# EAGLE board ProjectSchematic_v40 (EAGLE 9.7.0)
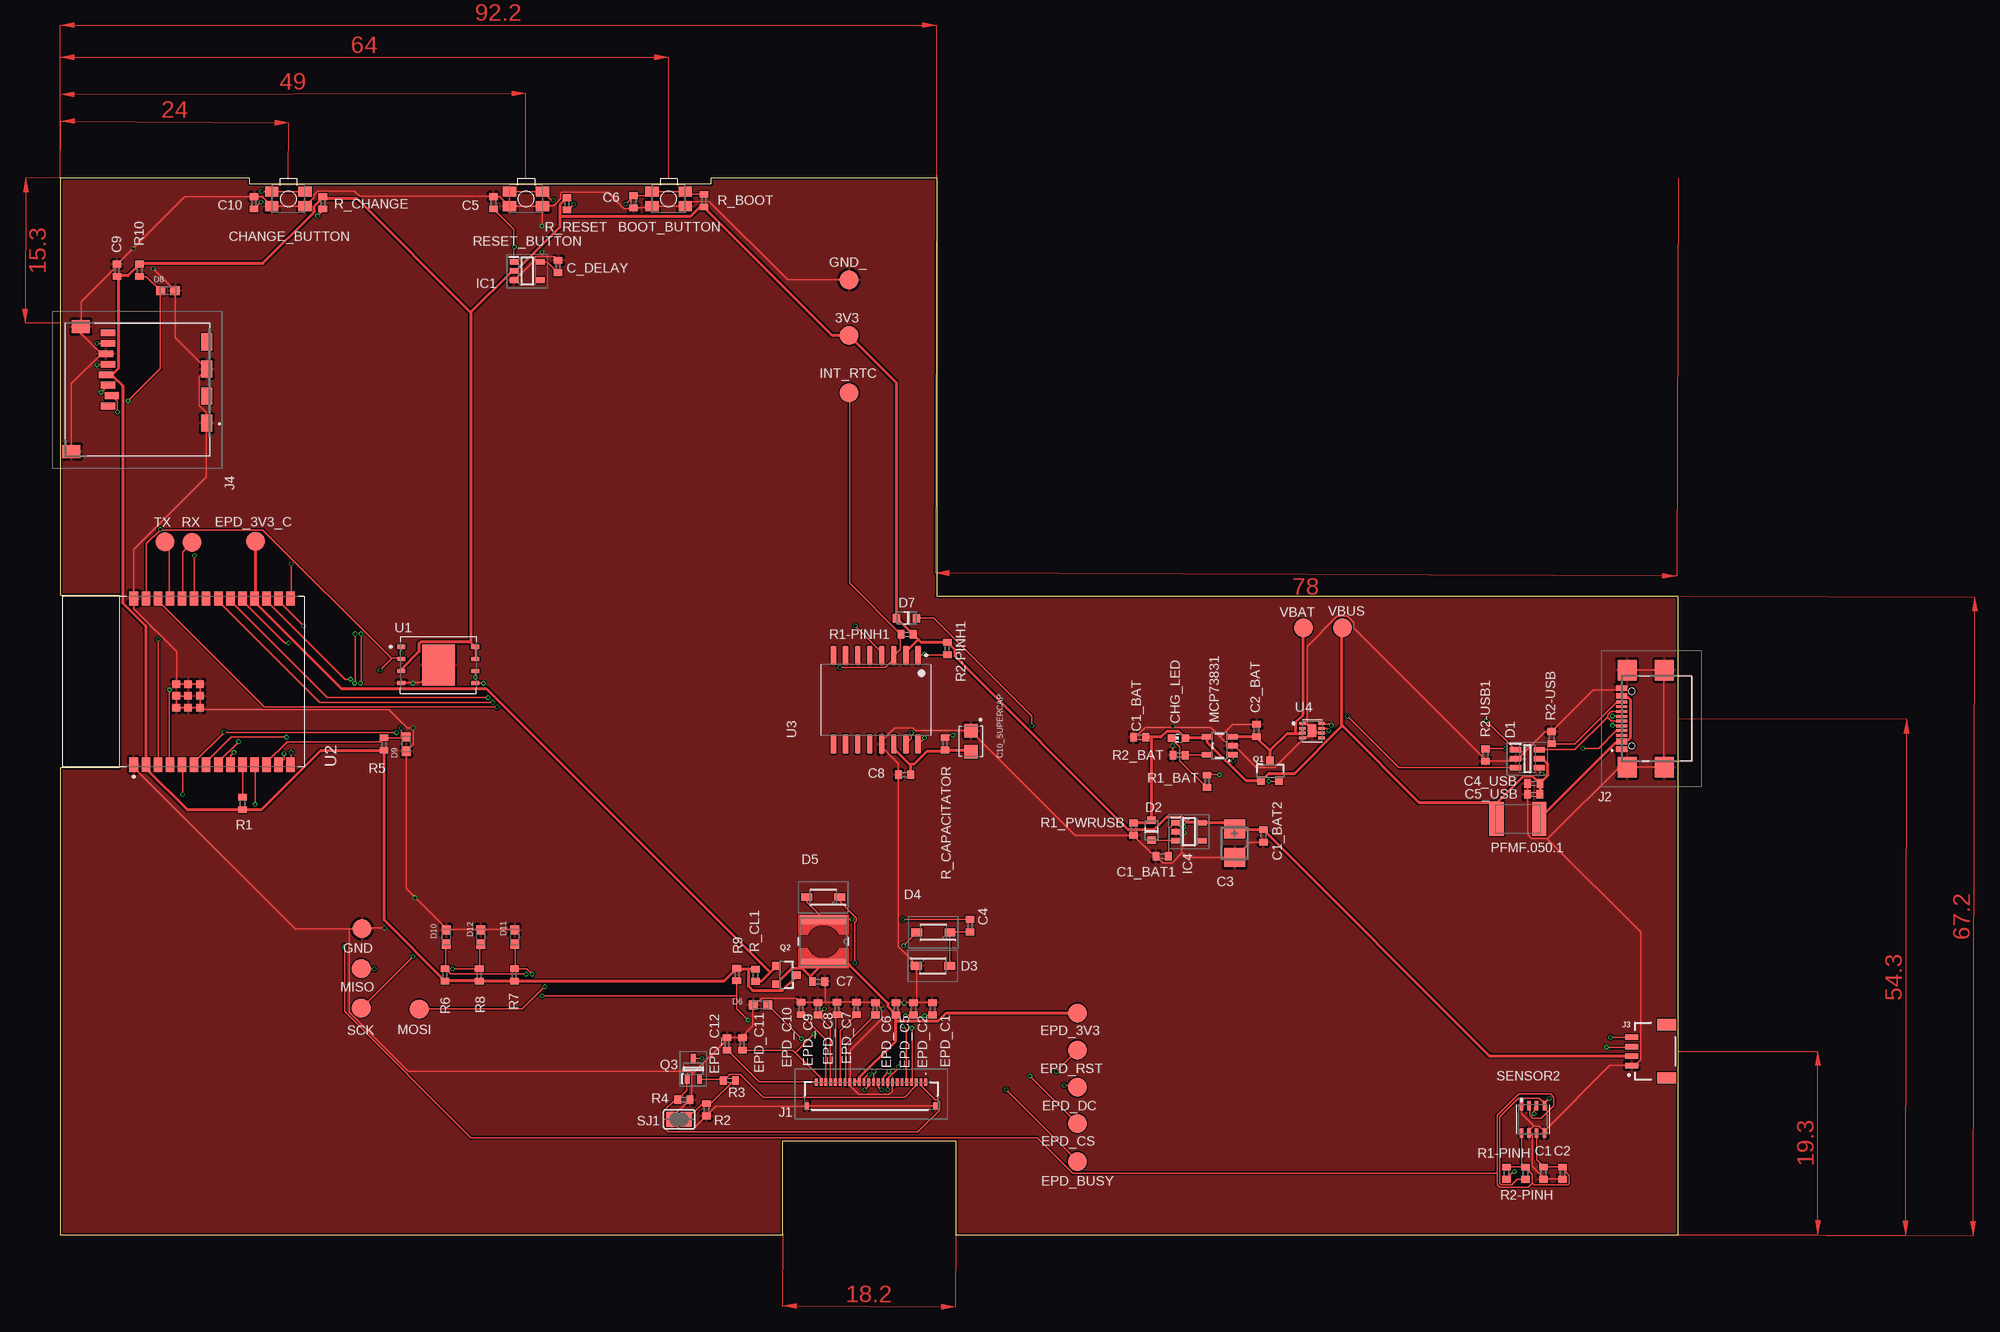
[diagram p0: board, top side]
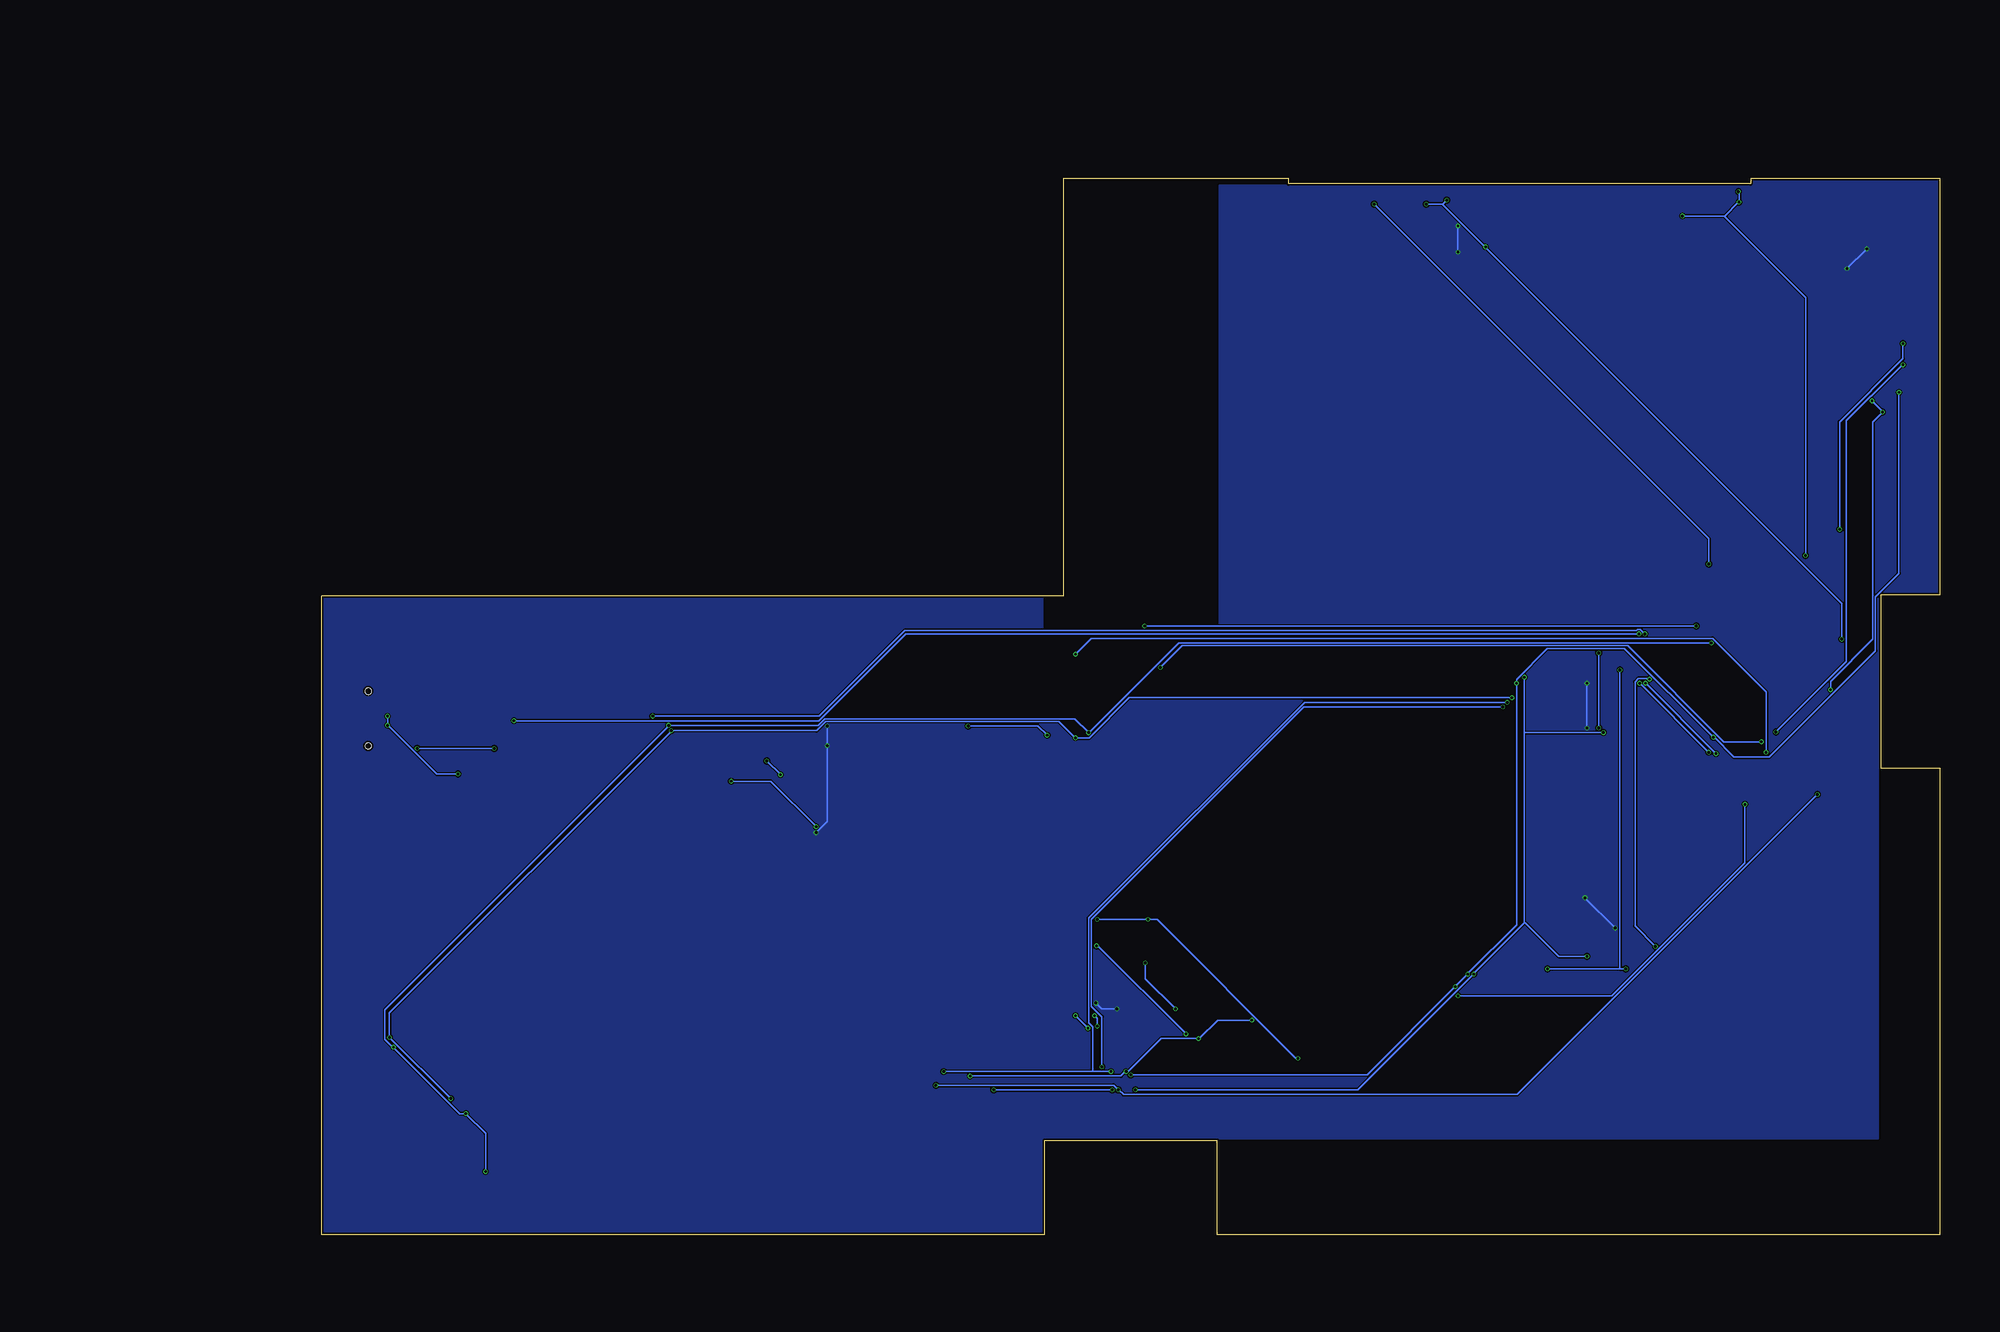
[diagram p1: board, bottom side, seen from below]

Size 170.2 x 111.2 mm. Coordinates in mm from the lower left corner, seen from the top.
Outline: 0,0 76,0 76,9.9 94.2,9.9 94.2,0 170.2,0 170.2,67.2 92.2,67.2 92.2,111.2 68.5,111.2 68.5,110.6 19.9,110.6 19.9,111.2 0,111.2 0,67.3 6.2,67.3 6.2,49.1 0,49.1 0,0
Copper layers (1*16): Top 0.035mm / dielectric 1.6mm / Bottom 0.035mm
Design rules "jlcpcb-2layers.dru": minimum track width 0.15mm, minimum drill 0.3mm, track to track 5mil, track to pad 5mil, pad to pad 5mil, via to via 5mil, smd to smd 5mil, copper to edge 0.2mm, drill to drill 6mil, minimum pad ring 10mil, minimum via ring 3mil, stop-mask expansion 4mil, vias tented up to drill 0mil, thermal gap 10mil
Net classes: 1 Alimentare: width 0.3 mm

## Footprints (pad centres in the part's own frame; a part is rotated, then mirrored left to right if it is on the bottom)
TP20R = smd 2 x 2: TP 0,0
MYBUTTON = smd 1.4 x 1.05: 1 1.75,0.75; 2 -1.75,0.75; 3 -1.75,-0.75; 4 1.75,-0.75
ESP32_WROVER_EAGLE-LTSPICE_C0402 = smd 0.7 x 0.9: 1 -0.65,0; 2 0.65,0
RCL_CT3528 = smd 2 x 2.2: + -1.5,0; - 1.5,0
CAPCP3225X100N = smd 1.4 x 1.4: 1 -1.1,0; 2 1.1,0
ADAFRUIT_CHIP-LED0603 = smd 0.8 x 0.8: A 0,-0.75; C 0,0.75
SOT95P280X145-6N = smd 1.2 x 0.6: 1 -1.25,0.95; 2 -1.25,0; 3 -1.25,-0.95; 4 1.25,-0.95; 5 1.25,0; 6 1.25,0.95
ESP32_WROVER_AVX---SD0805S020S1R0_AVX_SD0805S020S1R0_0 = smd 0.8 x 0.9: 1 -1.05,0; 2 1.05,0
SOD3716X135N = smd 1.15 x 0.8: 1 -1.75,0; 2 1.75,0
DIOC1608X36N = smd 0.97 x 0.94: 1 -0.75,0; 2 0.75,0
SOT95P280X125-5N = smd 0.9 x 0.6: 1 -1.4,0.95; 2 -1.4,0; 3 -1.4,-0.95; 4 1.4,-0.95; 5 1.4,0.95
SOT95P280X120-5N = smd 0.9 x 0.6: 1 -1.4,0.95; 2 -1.4,0; 3 -1.4,-0.95; 4 1.4,-0.95; 5 1.4,0.95
FH34SRJ24S05SH99 = smd 0.3 x 0.8: 1 5.75,1.45; 2 5.25,1.45; 3 4.75,1.45; 4 4.25,1.45; 5 3.75,1.45; 6 3.25,1.45; 7 2.75,1.45; 8 2.25,1.45; 9 1.75,1.45; 10 1.25,1.45; 11 0.75,1.45; 12 0.25,1.45; 13 -0.25,1.45; 14 -0.75,1.45; 15 -1.25,1.45; 16 -1.75,1.45; 17 -2.25,1.45; 18 -2.75,1.45; 19 -3.25,1.45; 20 -3.75,1.45; 21 -4.25,1.45; 22 -4.75,1.45; 23 -5.25,1.45; 24 -5.75,1.45 | smd 0.4 x 0.8: MP1 6.75,-1.05; MP2 -6.75,-1.05
SAMACSYS_PARTS_USB4110GFA = smd 0.3 x 1.15: A1 -3.35,3.678; A4 -2.55,3.678; A5 -1.25,3.678; A6 -0.25,3.678; A7 0.25,3.678; A8 1.25,3.678; A9 2.55,3.678; A12 3.35,3.678; B1 3.05,3.678; B4 2.25,3.678; B5 1.75,3.678; B6 0.75,3.678; B7 -0.75,3.678; B8 -1.75,3.678; B9 -2.25,3.678; B12 -3.05,3.678 | smd 2.18 x 2: MP1 -5.11,-0.827; MP2 5.11,-0.827; MP3 -5.11,3.103; MP4 5.11,3.103 | hole 0.65: -2.89,2.603; 2.89,2.603
JST04_1MM_RA = smd 0.6 x 1.35: 1 -1.5,0; 2 -0.5,0; 3 0.5,0; 4 1.5,0 | smd 1.2 x 2: NC1 2.8,-3.675; NC2 -2.8,-3.675
112ATAARR03ATTEND = smd 1.8 x 1.2: G1 10.6,10.4; G2 4.9,10.4; S1 7.75,10.4; S2 2.05,10.4 | smd 1.4 x 1.9: G3 13.6,-3.85; G4 0.45,-2.85 | smd 0.7 x 1.5: P1 8.8,0; P2 7.7,0.4; P3 6.6,0; P4 5.5,-0.2; P5 4.4,0; P6 3.3,-0.2; P7 2.2,0; P8 1.1,0
IND_4828-WE-TPC_WRE = smd 0.889 x 4.826: 1 -2.286,0; 2 2.286,0
ESP32_WROVER_SPARKFUN-IC-POWER_SOT23-5 = smd 0.55 x 1.2: 1 -0.95,-1.3; 2 0,-1.3; 3 0.95,-1.3; 4 0.95,1.3; 5 -0.95,1.3
ESP32C6_VARISTOR_CT/CN1812 = smd 1.5 x 3.6: 1 -2.25,0; 2 2.25,0
ESP32_WROVER_SPARKFUN-DISCRETESEMI_SOT23-3 = smd 0.8 x 0.9: 1 -0.95,-1; 2 0.95,-1; 3 0,1.1
SOT65P210X110-3N = smd 1.05 x 0.5: 1 -1.05,0.65; 2 -1.05,-0.65; 3 1.05,0
ESP32_WROVER_EAGLE-LTSPICE_R0402 = smd 0.7 x 0.9: 1 -0.65,0; 2 0.65,0
ESP32_WROVER_BME680_PSON80P300X300X100-8N = smd 1.016 x 0.5: 1 1.458,1.2; 2 1.458,0.4; 3 1.458,-0.4; 4 1.458,-1.2; 5 -1.458,-1.22; 6 -1.458,-0.4; 7 -1.458,0.4; 8 -1.458,1.2
SJ = smd 1.168 x 1.6: 1 -0.762,0; 2 0.762,0
SON127P600X800X80-9N = smd 0.94 x 0.44: 1 -3.895,1.905; 2 -3.895,0.635; 3 -3.895,-0.635; 4 -3.895,-1.905; 5 3.895,-1.905; 6 3.895,-0.635; 7 3.895,0.635; 8 3.895,1.905 | smd 3.4 x 4.3: 9 0,0
XCVR_ESP32-C6-WROOM-1-N8 = smd 1.5 x 0.9: 1 -8.75,5.26; 2 -8.75,3.99; 3 -8.75,2.72; 4 -8.75,1.45; 5 -8.75,0.18; 6 -8.75,-1.09; 7 -8.75,-2.36; 8 -8.75,-3.63; 9 -8.75,-4.9; 10 -8.75,-6.17; 11 -8.75,-7.44; 12 -8.75,-8.71; 13 -8.75,-9.98; 14 -8.75,-11.25; 15 8.75,-11.25; 16 8.75,-9.98; 17 8.75,-8.71; 18 8.75,-7.44; 19 8.75,-6.17; 20 8.75,-4.9; 21 8.75,-3.63; 22 8.75,-2.36; 23 8.75,-1.09; 24 8.75,0.18; 25 8.75,1.45; 26 8.75,2.72; 27 8.75,3.99; 28 8.75,5.26 | smd 0.8 x 0.8: 29_1 -2.755,0.79; 29_2 -1.505,0.79; 29_3 -0.255,0.79; 29_4 -2.755,-0.46; 29_5 -1.505,-0.46; 29_6 -0.255,-0.46; 29_7 -2.755,-1.71; 29_8 -1.505,-1.71; 29_9 -0.255,-1.71
SOIC127P1032X265-16N = smd 2.05 x 0.59: 1 -4.655,4.445; 2 -4.655,3.175; 3 -4.655,1.905; 4 -4.655,0.635; 5 -4.655,-0.635; 6 -4.655,-1.905; 7 -4.655,-3.175; 8 -4.655,-4.445; 9 4.655,-4.445; 10 4.655,-3.175; 11 4.655,-1.905; 12 4.655,-0.635; 13 4.655,0.635; 14 4.655,1.905; 15 4.655,3.175; 16 4.655,4.445
SON50P200X200X80-9N = smd 0.76 x 0.27: 1 -0.985,0.75; 4 -0.985,-0.75; 5 0.985,-0.75; 6 0.985,-0.25; 7 0.985,0.25; 8 0.985,0.75 | smd 0.76 x 0.3: 2 -0.985,0.25; 3 -0.985,-0.25 | smd 0.9 x 1.3: 9 0,0

## Placement (x,y rotation side)
3V3  TPTP20R  [TP20R]  83,94.62 0 top
BOOT_BUTTON  BUTTON_CUSYOMV1  [MYBUTTON]  64,109.01 180 top
C1  100nF  [ESP32_WROVER_EAGLE-LTSPICE_C0402]  156.03,6.48 270 top
C1_BAT  4.7uF  [ESP32_WROVER_EAGLE-LTSPICE_C0402]  113.55,52.35 180 top
C1_BAT1  4.7uF  [ESP32_WROVER_EAGLE-LTSPICE_C0402]  115.91,39.83 180 top
C1_BAT2  4.7uF\  [ESP32_WROVER_EAGLE-LTSPICE_C0402]  126.57,41.97 270 top
C2  100nF  [ESP32_WROVER_EAGLE-LTSPICE_C0402]  158.03,6.48 270 top
C2_BAT  4.7uF  [ESP32_WROVER_EAGLE-LTSPICE_C0402]  125.85,53.06 90 top
C3  100uF TANT  [RCL_CT3528]  123.55,41.2 270 top
C4  4.7uF/25V  [ESP32_WROVER_EAGLE-LTSPICE_C0402]  95.71,32.52 90 top
C4_USB  100nF  [ESP32_WROVER_EAGLE-LTSPICE_C0402]  155,47.48 180 top
C5  1uF  [ESP32_WROVER_EAGLE-LTSPICE_C0402]  45.57,108.58 90 top
C5_USB  4.7uF  [ESP32_WROVER_EAGLE-LTSPICE_C0402]  154.99,46.33 180 top
C6  100nF  [ESP32_WROVER_EAGLE-LTSPICE_C0402]  60.32,108.68 270 top
C7  10uF  [ESP32_WROVER_EAGLE-LTSPICE_C0402]  79.78,26.63 0 top
C8  100nF  [ESP32_WROVER_EAGLE-LTSPICE_C0402]  88.82,48.41 180 top
C9  100nF  [ESP32_WROVER_EAGLE-LTSPICE_C0402]  5.97,101.48 90 top
C10  100nF  [ESP32_WROVER_EAGLE-LTSPICE_C0402]  20.4,108.58 90 top
C10_SUPERCAP  CPH3225A  [CAPCP3225X100N]  95.81,51.93 270 top
C_DELAY  100nF  [ESP32_WROVER_EAGLE-LTSPICE_C0402]  52.38,101.88 90 top
CHANGE_BUTTON  BUTTON_CUSYOMV1  [MYBUTTON]  24,109.01 180 top
CHG_LED  [ADAFRUIT_CHIP-LED0603]  117.64,52.26 90 top
D1  USBLC6-2SC6Y  [SOT95P280X145-6N]  154.34,50.08 0 top
D2  ESP32_WROVER_AVX---SD0805S020S1R0_AVX_SD0805S020S1R0_0_0AVX_SD0805S020S1R0_0_0  [ESP32_WROVER_AVX---SD0805S020S1R0_AVX_SD0805S020S1R0_0]  114.8,42.56 90 top
D3  MBR0530  [SOD3716X135N]  91.81,28.29 0 top
D4  MBR0530  [SOD3716X135N]  91.85,31.81 180 top
D5  MBR0530  [SOD3716X135N]  80.27,35.5 180 top
D6  PGB1010603MR  [DIOC1608X36N]  73.67,24.18 0 top
D7  ESP32_WROVER_AVX---SD0805S020S1R0_AVX_SD0805S020S1R0_0_0AVX_SD0805S020S1R0_0_0  [ESP32_WROVER_AVX---SD0805S020S1R0_AVX_SD0805S020S1R0_0]  89.04,64.89 180 top
D8  PGB1010603MR  [DIOC1608X36N]  11.33,99.33 180 top
D9  PGB1010603MR  [DIOC1608X36N]  36.41,51.63 90 top
D10  PGB1010603MR  [DIOC1608X36N]  40.6,31.33 270 top
D11  PGB1010603MR  [DIOC1608X36N]  47.81,31.33 270 top
D12  PGB1010603MR  [DIOC1608X36N]  44.22,31.33 270 top
EPD_3V3  TPTP20R  [TP20R]  107,23.34 0 top
EPD_3V3_C  TPTP20R  [TP20R]  20.57,72.96 0 top
EPD_BUSY  TPTP20R  [TP20R]  107,7.7 0 top
EPD_C1  1uF/50V  [ESP32_WROVER_EAGLE-LTSPICE_C0402]  91.75,23.78 90 top
EPD_C2  1uF/50V  [ESP32_WROVER_EAGLE-LTSPICE_C0402]  89.75,23.78 90 top
EPD_C5  0.1uF/50V  [ESP32_WROVER_EAGLE-LTSPICE_C0402]  87.91,23.78 90 top
EPD_C6  1uF/50V  [ESP32_WROVER_EAGLE-LTSPICE_C0402]  85.75,23.78 90 top
EPD_C7  1uF/50V  [ESP32_WROVER_EAGLE-LTSPICE_C0402]  83.75,23.82 90 top
EPD_C8  1uF/50V  [ESP32_WROVER_EAGLE-LTSPICE_C0402]  81.7,23.82 90 top
EPD_C9  1uF/50V  [ESP32_WROVER_EAGLE-LTSPICE_C0402]  79.7,23.78 90 top
EPD_C10  1uF/50V  [ESP32_WROVER_EAGLE-LTSPICE_C0402]  77.91,23.82 90 top
EPD_C11  1uF/50V  [ESP32_WROVER_EAGLE-LTSPICE_C0402]  71.76,20.08 90 top
EPD_C12  1uF/50V  [ESP32_WROVER_EAGLE-LTSPICE_C0402]  70.16,20.08 90 top
EPD_CS  TPTP20R  [TP20R]  107,11.7 0 top
EPD_DC  TPTP20R  [TP20R]  107,15.52 0 top
EPD_RST  TPTP20R  [TP20R]  107,19.44 0 top
GND  TPTP20R  [TP20R]  31.77,32.2 0 top
GND_  TPTP20R  [TP20R]  83,100.48 0 top
IC1  BD5229G-TR  [SOT95P280X125-5N]  49.13,101.41 0 top
IC4  XC6220A331MR-G  [SOT95P280X120-5N]  118.74,42.41 0 top
INT_RTC  TPTP20R  [TP20R]  83,88.6 0 top
J1  FH34SRJ-24S-0.5SH_99_  [FH34SRJ24S05SH99]  85.3,14.6 0 top
J2  SAMACSYS_PARTS_USB4110-GF-AUSB4  [SAMACSYS_PARTS_USB4110GFA]  167.93,54.3 90 top
J3  QWIIC_RIGHT_ANGLE  [JST04_1MM_RA]  165.32,19.3 90 top
J4  112A-TAAR-R03_ATTEND  [112ATAARR03ATTEND]  5.02,96 270 top
L1  68uH  [IND_4828-WE-TPC_WRE]  80.28,30.85 270 top
MCP73831  ESP32_WROVER_SPARKFUN-IC-POWER_MCP73831  [ESP32_WROVER_SPARKFUN-IC-POWER_SOT23-5]  121.96,51.46 90 top
MISO  TPTP20R  [TP20R]  31.67,28.02 0 top
MOSI  TPTP20R  [TP20R]  37.77,23.74 0 top
PFMF.050.1  ESP32C6_VARISTORCN1812  [ESP32C6_VARISTOR_CT/CN1812]  153.35,43.75 180 top
Q1  20V/4.2A/52mΩ/1.4W  [ESP32_WROVER_SPARKFUN-DISCRETESEMI_SOT23-3]  127.28,48.77 0 top
Q2  20V/4.2A/52mΩ/1.4W  [ESP32_WROVER_SPARKFUN-DISCRETESEMI_SOT23-3]  76.37,27.33 270 top
Q3  SI1308EDL-T1-GE3  [SOT65P210X110-3N]  66.6,17.46 90 top
R1  10k  [ESP32_WROVER_EAGLE-LTSPICE_R0402]  19.18,45.38 90 top
R1-PINH  10k  [ESP32_WROVER_EAGLE-LTSPICE_R0402]  152.13,6.48 90 top
R1-PINH1  10k  [ESP32_WROVER_EAGLE-LTSPICE_R0402]  89.08,63.17 0 top
R1_BAT  200  [ESP32_WROVER_EAGLE-LTSPICE_R0402]  120.63,47.71 270 top
R1_PWRUSB  100k  [ESP32_WROVER_EAGLE-LTSPICE_R0402]  112.91,42.68 90 top
R2  2.2  [ESP32_WROVER_EAGLE-LTSPICE_R0402]  67.98,13.16 90 top
R2-PINH  10k  [ESP32_WROVER_EAGLE-LTSPICE_R0402]  154.13,6.48 90 top
R2-PINH1  10k  [ESP32_WROVER_EAGLE-LTSPICE_R0402]  93.32,61.68 90 top
R2-USB  5k1  [ESP32_WROVER_EAGLE-LTSPICE_R0402]  156.87,52.31 90 top
R2-USB1  5k1  [ESP32_WROVER_EAGLE-LTSPICE_R0402]  149.93,50.47 90 top
R2_BAT  2k  [ESP32_WROVER_EAGLE-LTSPICE_R0402]  117.7,50.47 180 top
R3  0.47  [ESP32_WROVER_EAGLE-LTSPICE_R0402]  70.4,16.23 0 top
R4  10k  [ESP32_WROVER_EAGLE-LTSPICE_R0402]  65.62,14.21 0 top
R5  10k  [ESP32_WROVER_EAGLE-LTSPICE_R0402]  34.04,51.63 270 top
R6  10k  [ESP32_WROVER_EAGLE-LTSPICE_R0402]  40.46,27.33 270 top
R7  10k  [ESP32_WROVER_EAGLE-LTSPICE_R0402]  47.77,27.33 270 top
R8  10k  [ESP32_WROVER_EAGLE-LTSPICE_R0402]  44.08,27.33 270 top
R9  10k  [ESP32_WROVER_EAGLE-LTSPICE_R0402]  71.17,27.37 90 top
R10  10k  [ESP32_WROVER_EAGLE-LTSPICE_R0402]  8.35,101.48 90 top
R_BOOT  10k  [ESP32_WROVER_EAGLE-LTSPICE_R0402]  67.72,108.82 270 top
R_CAPACITATOR  15  [ESP32_WROVER_EAGLE-LTSPICE_R0402]  93.06,51.66 90 top
R_CHANGE  10k  [ESP32_WROVER_EAGLE-LTSPICE_R0402]  27.62,108.58 90 top
R_CL1  10k  [ESP32_WROVER_EAGLE-LTSPICE_R0402]  73.13,27.31 270 top
R_RESET  10k  [ESP32_WROVER_EAGLE-LTSPICE_R0402]  53.29,108.48 90 top
RESET_BUTTON  BUTTON_CUSYOMV1  [MYBUTTON]  49,109.01 180 top
RX  TPTP20R  [TP20R]  13.87,72.84 0 top
SCK  TPTP20R  [TP20R]  31.67,23.86 0 top
SENSOR2  BME680  [ESP32_WROVER_BME680_PSON80P300X300X100-8N]  154.92,12.15 90 top
SJ1  [SJ]  65.11,12.14 0 top
TX  TPTP20R  [TP20R]  11.02,72.92 0 top
U1  W25Q512JVEIQ  [SON127P600X800X80-9N]  39.78,59.96 0 top
U2  ESP32-C6-WROOM-1-N8  [XCVR_ESP32-C6-WROOM-1-N8]  13,58.2 90 top
U3  DS3231SN#  [SOIC127P1032X265-16N]  85.79,56.27 270 top
U4  MAX17048G+T10  [SON50P200X200X80-9N]  131.69,53.03 0 top
VBAT  TPTP20R  [TP20R]  130.77,63.86 0 top
VBUS  TPTP20R  [TP20R]  134.87,63.88 0 top

## Library data of the parts
3V3 BOOT_BUTTON CHANGE_BUTTON CHG_LED EPD_3V3 EPD_3V3_C EPD_BUSY EPD_CS EPD_DC EPD_RST GND GND_ INT_RTC J2 MISO MOSI PFMF.050.1 RESET_BUTTON RX SCK SJ1 TX VBAT VBUS = ProjectLibrary
C1 C1_BAT C1_BAT1 C1_BAT2 C2 C2_BAT C4 C4_USB C5 C5_USB C6-C10 C_DELAY EPD_C1 EPD_C2 EPD_C5-EPD_C12 = ProjectLibrary; SPICEMODEL: NONE; SPICEPREFIX: C
C3 = ProjectLibrary; SPICEPREFIX: C
C10_SUPERCAP = ProjectLibrary; AVAILABILITY: Not in stock; CHECK_PRICES: https://www.snapeda.com/parts/CPH3225A/Seiko+Instruments/view-part/?ref=eda; DESCRIPTION: 11 mF (EDLC) Supercapacitor 3.3 V 1210 (3225 Metric) - -; MF: Seiko Instruments; MP: CPH3225A; PACKAGE: 1210 Seiko; PRICE: None; PURCHASE-URL: https://www.snapeda.com/api/url_track_click_mouser/?unipart_id=562593&manufacturer=Seiko Instruments&part_name=CPH3225A&search_term=None; SNAPEDA_LINK: https://www.snapeda.com/parts/CPH3225A/Seiko+Instruments/view-part/?ref=snap
D1 = ProjectLibrary; AVAILABILITY: In Stock; CHECK_PRICES: https://www.snapeda.com/parts/USBLC6-2SC6Y/STMicroelectronics/view-part/?ref=eda; DESCRIPTION: 17V Clamp 5A (8/20µs) Ipp Tvs Diode Surface Mount SOT-23-6; MF: STMicroelectronics; MP: USBLC6-2SC6Y; PACKAGE: SOT-23-6 STMicroelectronics; PRICE: None; SNAPEDA_LINK: https://www.snapeda.com/parts/USBLC6-2SC6Y/STMicroelectronics/view-part/?ref=snap
D2 D7 = ProjectLibrary; CENTROID_NOT_SPECIFIED: No; DATASHEET: http://datasheets.avx.com/schottky.pdf; DIGIKEY_DESCRIPTION: DIODE SCHOTTKY 20V 1A 0805; DIGIKEY_PART_NUMBER: 478-7800-1-ND; LEAD_FREE: yes; MF: AVX; MOUSER_PART_NUMBER: 581-SD0805S020S1R0; PACKAGE: 0805 (2012 metric); PREFIX: D; ROHS: yes; TEMPERATURE_RANGE_HIGH: +125°C; TEMPERATURE_RANGE_LOW: -55°C
D3-D5 = ProjectLibrary; AVAILABILITY: In Stock; CHECK_PRICES: https://www.snapeda.com/parts/MBR0530/Onsemi/view-part/?ref=eda; DESCRIPTION: Diode Schottky 30 V 500mA Surface Mount SOD-123; MF: ON Semiconductor; MP: MBR0530; PACKAGE: SOD-123-2 ON Semiconductor; PRICE: None; PURCHASE-URL: https://www.snapeda.com/api/url_track_click_mouser/?unipart_id=179458&manufacturer=ON Semiconductor&part_name=MBR0530&search_term=None; SNAPEDA_LINK: https://www.snapeda.com/parts/MBR0530/Onsemi/view-part/?ref=snap
D6 D8-D12 = ProjectLibrary; AVAILABILITY: In Stock; CHECK_PRICES: https://www.snapeda.com/parts/PGB1010603MR/Littelfuse/view-part/?ref=eda; DESCRIPTION: 150V (Typ) Clamp - Ipp Tvs Diode Surface Mount 0603 (1608 Metric); MF: Littelfuse Inc.; MP: PGB1010603MR; PACKAGE: 0603 Littelfuse Inc.; PRICE: None; PURCHASE-URL: https://www.snapeda.com/api/url_track_click_mouser/?unipart_id=5659453&manufacturer=Littelfuse Inc.&part_name=PGB1010603MR&search_term=None; SNAPEDA_LINK: https://www.snapeda.com/parts/PGB1010603MR/Littelfuse/view-part/?ref=snap
IC1 = ProjectLibrary; DESCRIPTION: Voltage Detector with Adjustable Delay Time: CMOS processes are utilized to develop high precision, low current consumption CMOS reset ICs that allow arbitrary setting of the delay time. The extensive lineup includes both Nch Open Drain and CMOS output types in a wide range of detection voltages (from 2.3V to 6.0V, in 0.1V steps), enabling selection of the ideal solution based on customer requirements. In addition, the entire series is of course both lead-free and RoHS-compliant.; HEIGHT: 1.25mm; MANUFACTURER_NAME: ROHM Semiconductor; MANUFACTURER_PART_NUMBER: BD5229G-TR; MOUSER_PART_NUMBER: 755-BD5229G-TR; MOUSER_PRICE-STOCK: https://www.mouser.co.uk/ProductDetail/ROHM-Semiconductor/BD5229G-TR?qs=4kLU8WoGk0vvnhrrYwdszw%3D%3D
IC4 = ProjectLibrary; DESCRIPTION: LDO Voltage Regulators; HEIGHT: 1.2mm; MANUFACTURER_NAME: Torex; MANUFACTURER_PART_NUMBER: XC6220A331MR-G; MOUSER_PART_NUMBER: 865-XC6220A331MR-G; MOUSER_PRICE-STOCK: https://www.mouser.co.uk/ProductDetail/Torex-Semiconductor/XC6220A331MR-G?qs=AsjdqWjXhJ8ZSWznL1J0gg%3D%3D
J1 = ProjectLibrary; DESCRIPTION: 24 Position FFC, FPC Connector Contacts, Top and Bottom 0.020" (0.50mm) Surface Mount, Right Angle; HEIGHT: 1.1mm; MANUFACTURER_NAME: Hirose; MANUFACTURER_PART_NUMBER: FH34SRJ-24S-0.5SH(99); MOUSER_PART_NUMBER: 798-FH34SRJ24S05SH99; MOUSER_PRICE-STOCK: https://www.mouser.co.uk/ProductDetail/Hirose-Connector/FH34SRJ-24S-0.5SH99?qs=vcbW%252B4%252BSTIpKBl5ap9J8Fw%3D%3D
J3 = ProjectLibrary; PROD_ID: CONN-13694
J4 = ProjectLibrary; DESCRIPTION: Micro SD Card Socket, Push-Push Type, Top Mount, SMT, H=1.83mm, 10u; HEIGHT: 1.9mm; MANUFACTURER_NAME: ATTEND; MANUFACTURER_PART_NUMBER: 112A-TAAR-R03 ATTEND
L1 = ProjectLibrary; COPYRIGHT: Copyright (C) 2024 Ultra Librarian. All rights reserved.; MANUFACTURER_PART_NUMBER: 744043680; MFR_NAME: Wurth Electronics
MCP73831 = ProjectLibrary; PROD_ID: IC-09995
Q1 Q2 = ProjectLibrary; PROD_ID: TRAN-14388
Q3 = ProjectLibrary; AVAILABILITY: In Stock; CHECK_PRICES: https://www.snapeda.com/parts/SI1308EDL-T1-GE3/Vishay+Siliconix/view-part/?ref=eda; DESCRIPTION: Si1308EDL-T1-GE3 N-channel MOSFET Transistor, 1.5 A, 30 V, 3-Pin SC-70 | Siliconix / Vishay SI1308EDL-T1-GE3; MF: Vishay Siliconix; MP: SI1308EDL-T1-GE3; PACKAGE: SOT-323 Vishay Semiconductor; PRICE: None; PURCHASE-URL: https://www.snapeda.com/api/url_track_click_mouser/?unipart_id=274603&manufacturer=Vishay Siliconix&part_name=SI1308EDL-T1-GE3&search_term=None; SNAPEDA_LINK: https://www.snapeda.com/parts/SI1308EDL-T1-GE3/Vishay+Siliconix/view-part/?ref=snap
R1 R1-PINH R1-PINH1 R1_BAT R1_PWRUSB R2 R2-PINH R2-PINH1 R2-USB R2-USB1 R2_BAT R3-R10 R_BOOT R_CAPACITATOR R_CHANGE R_CL1 R_RESET = ProjectLibrary; SPICEMODEL: NONE; SPICEPREFIX: R
SENSOR2 = ProjectLibrary; AVAILABILITY: Unavailable; DESCRIPTION: Integrated Environmental Unit; MF: Bosch Sensortec; MP: BME680; PACKAGE: LGA-8 Bosch Tools; PRICE: None
U1 = ProjectLibrary; AVAILABILITY: In Stock; CHECK_PRICES: https://www.snapeda.com/parts/W25Q512JVEIQ/Winbond+Electronics/view-part/?ref=eda; DESCRIPTION: FLASH - NOR Memory IC 512Mb (64M x 8) SPI - Quad I/O 133 MHz 8-WSON (8x6); MF: Winbond Electronics; MP: W25Q512JVEIQ; PACKAGE: Package; PRICE: None; SNAPEDA_LINK: https://www.snapeda.com/parts/W25Q512JVEIQ/Winbond+Electronics/view-part/?ref=snap
U2 = ProjectLibrary; AVAILABILITY: In Stock; CHECK_PRICES: https://www.snapeda.com/parts/ESP32-C6-WROOM-1-N8/Espressif+Systems/view-part/?ref=eda; DESCRIPTION: Multiprotocol Modules ESP32-C6 module, Wi-Fi 6 in 2.4 GHz band, Bluetooth 5, Zigbee 3.0 and Thread. ESP34-WROOM Compatible - ENGINEERING SAMPLE; MF: Espressif Systems; MP: ESP32-C6-WROOM-1-N8; PACKAGE: None; PRICE: None; SNAPEDA_LINK: https://www.snapeda.com/parts/ESP32-C6-WROOM-1-N8/Espressif+Systems/view-part/?ref=snap
U3 = ProjectLibrary; AVAILABILITY: In Stock; CHECK_PRICES: https://www.snapeda.com/parts/DS3231SN%23/Analog+Devices/view-part/?ref=eda; DESCRIPTION: Extremely Accurate I²C-Integrated RTC/TCXO/Crystal; MF: Analog Devices; MP: DS3231SN#; PACKAGE: SOIC-16 Maxim; PRICE: None; PURCHASE-URL: https://www.snapeda.com/api/url_track_click_mouser/?unipart_id=99048&manufacturer=Analog Devices&part_name=DS3231SN#&search_term=None; SNAPEDA_LINK: https://www.snapeda.com/parts/DS3231SN%23/Analog+Devices/view-part/?ref=snap
U4 = ProjectLibrary; AVAILABILITY: In Stock; CHECK_PRICES: https://www.snapeda.com/parts/MAX17048G+T10/Analog+Devices/view-part/?ref=eda; DESCRIPTION: 3µA 1-Cell/2-Cell Fuel Gauge with ModelGauge; MF: Analog Devices; MP: MAX17048G+T10; PACKAGE: TDFN-8 Maxim; PRICE: None; PURCHASE-URL: https://www.snapeda.com/api/url_track_click_mouser/?unipart_id=329239&manufacturer=Analog Devices&part_name=MAX17048G+T10&search_term=None; SNAPEDA_LINK: https://www.snapeda.com/parts/MAX17048G+T10/Analog+Devices/view-part/?ref=snap

## Nets
3V3 [Alimentare]: 3V3.TP C1_BAT2.1 C3.+ C9.1 D7.2 IC1.2 IC4.5 J3.2 J4.P4 Q2.3 R1-PINH1.2 R1.1 R2-PINH1.2 R5.2 R6.2 R7.2 R8.2 R9.2 R10.2 R_BOOT.2 R_CHANGE.2 R_CL1.1 R_RESET.2 U1.3 U1.7 U1.8 U2.2 U3.2
32KHZ: R2-PINH1.1 U2.9 U3.1
DN: D1.4 J2.A7 J2.B7
DP: D1.6 J2.A6 J2.B6
EPD_3V3 [Alimentare]: C7.1 EPD_3V3.TP EPD_C5.1 J1.15 J1.16 L1.2 Q2.2
EPD_3V3_C [Alimentare]: EPD_3V3_C.TP Q2.1 R_CL1.2 U2.18
EPD_BUSY: EPD_BUSY.TP J1.9 U2.26
EPD_CS: D6.2 EPD_CS.TP J1.12 R9.1 U2.11
EPD_DC: EPD_DC.TP J1.11 U2.5
EPD_RST: EPD_RST.TP J1.10 U2.21
FLASH_CS: D9.2 R5.1 U1.1 U2.12
GDR: J1.2 Q3.1 R4.1
GND: BOOT_BUTTON.1 BOOT_BUTTON.2 C1.2 C1_BAT1.2 C1_BAT2.2 C1_BAT.2 C2.2 C2_BAT.2 C3.- C4_USB.2 C5.2 C5_USB.2 C6.2 C7.2 C8.2 C9.2 C10.2 C10_SUPERCAP.1 C_DELAY.2 CHANGE_BUTTON.1 CHANGE_BUTTON.2 D1.2 D3.1 D6.1 D8.1 D9.1 D10.1 D11.1 D12.1 EPD_C1.2 EPD_C2.2 EPD_C5.2 EPD_C6.2 EPD_C7.2 EPD_C8.2 EPD_C9.2 EPD_C10.2 EPD_C11.2 EPD_C12.2 GND.TP GND_.TP IC1.3 IC4.2 J1.8 J1.17 J1.MP1 J1.MP2 J2.A1 J2.A12 J2.B1 J2.B12 J2.MP1 J2.MP2 J2.MP3 J2.MP4 J3.1 J4.G1 J4.G2 J4.G3 J4.G4 J4.P6 MCP73831.2 R1_PWRUSB.1 R2-USB1.1 R2-USB.2 R2.1 R2_BAT.2 R4.2 RESET_BUTTON.1 RESET_BUTTON.2 SENSOR2.1 SENSOR2.5 SENSOR2.7 SJ1.1 U1.4 U1.9 U2.1 U2.28 U2.29_1 U2.29_2 U2.29_3 U2.29_4 U2.29_5 U2.29_6 U2.29_7 U2.29_8 U2.29_9 U3.13 U4.1 U4.4 U4.6 U4.9
GPIO8: R1.2 U2.10
I2C_PW: C1.1 C2.1 R1-PINH.2 R2-PINH.2 SENSOR2.2 SENSOR2.6 SENSOR2.8 U2.17
INT_RTC: INT_RTC.TP R1-PINH1.1 U2.8 U3.3
IO/BOOT: BOOT_BUTTON.3 BOOT_BUTTON.4 C6.1 R_BOOT.1 U2.15
IO/CHANGE: C10.1 CHANGE_BUTTON.3 CHANGE_BUTTON.4 R_CHANGE.1 U2.23
MISO: D12.2 J4.P7 MISO.TP R8.1 U1.2 U2.27
MOSI: D11.2 J1.14 J4.P3 MOSI.TP R7.1 U1.5 U2.7
N$1: J2.B5 R2-USB.1
N$2: J2.A5 R2-USB1.2
N$3: C_DELAY.1 IC1.5
N$4: MCP73831.1 R1_BAT.1
N$5: C1_BAT1.1 D2.1 IC4.1 IC4.3 Q1.2
N$6: CHG_LED.C R1_BAT.2
N$7: C4.1 D3.2 D4.1
N$8: MCP73831.5 R2_BAT.1
N$16: EPD_C2.1 J1.5
N$17: EPD_C1.1 J1.4
N$18: D7.1 R_CAPACITATOR.2
N$19: EPD_C12.1 J1.24
N$21: EPD_C10.1 J1.22
N$23: EPD_C7.1 J1.19
N$24: EPD_C8.1 J1.20
N$25: EPD_C6.1 J1.18
PREVGH: D5.1 EPD_C9.1 J1.21
PREVGL: D4.2 EPD_C11.1 J1.23
RESE: J1.3 Q3.2 R3.1
RESE': R2.2 R3.2 SJ1.2
RESET: C5.1 IC1.1 R_RESET.1 RESET_BUTTON.3 RESET_BUTTON.4 U2.3
RTC_RST: U2.16 U3.4
RX: RX.TP U2.24
SCK: D10.2 J1.13 J4.P5 R6.1 SCK.TP U1.6 U2.6
SCL: J3.4 R2-PINH.1 SENSOR2.4 U2.20 U3.16 U4.7
SDA: J3.3 R1-PINH.1 SENSOR2.3 U2.19 U3.15 U4.8
SRC: C4.2 D5.2 L1.1 Q3.3
SS_SD: D8.2 J4.P2 R10.1 U2.4
TX: TX.TP U2.25
USB_D+: D1.1 U2.14
USB_D-: D1.3 U2.13
VBAT [Alimentare]: C2_BAT.1 MCP73831.3 Q1.3 U4.2 U4.3 VBAT.TP
VBUS [Alimentare]: C1_BAT.1 C4_USB.1 C5_USB.1 CHG_LED.A D1.5 D2.2 MCP73831.4 PFMF.050.1.2 Q1.1 R1_PWRUSB.2 VBUS.TP
VRTC [Alimentare]: C8.1 C10_SUPERCAP.2 R_CAPACITATOR.1 U3.14
VUSB [Alimentare]: J2.A4 J2.A9 J2.B4 J2.B9 PFMF.050.1.1

## Tracks (layer width: path | path; a pad name or v marks a point on that pad's centre or on a via)
3V3
  Top 0.3: 72.37,27.98 71.19,27.98 R9.2 71.05,27.91 69.8,26.66 47.92,26.66 R7.2 47.71,26.73 44.18,26.73 R8.2 44.04,26.73 40.51,26.73 R6.2 40.37,26.8 34.07,33.1 34.07,50.83 R5.2 34,50.97 27.42,50.97 21.19,44.74 19.32,44.74 R1.1 19.11,44.74 13.37,44.74 9.07,49.03 9.07,49.44 U2.2 9,49.58 9,64.06 6.58,66.48 6.58,89.33 5.54,90.37 J4.P4 4.85,90.51 5.47,90.51 6.09,91.13 6.09,100.76 C9.1 6.03,100.9 7.13,100.9 8.31,102.08 R10.2 8.45,102.21 21.33,102.21 26.73,107.61 26.73,108.24 27.56,109.07 27.56,109.21 R_CHANGE.2 27.7,109 31.23,109 43.07,97.16 43.21,97.09 | 72.37,27.98 73.13,27.98 R_CL1.1 | 72.37,27.98 72.37,26.18 72.85,25.69 75.97,25.69 77.42,27.15 77.42,27.29 Q2.3 | J3.2 165.3,18.84 150.34,18.84 126.66,42.52 C1_BAT2.1 126.52,42.66 123.68,42.66 C3.+ 123.54,42.73 122.92,43.35 IC4.5 120.01,43.42 118.49,43.42 117.93,43.97 116.41,43.97 115.09,42.66 112.32,42.66 94.11,60.87 94.11,61.56 93.42,62.26 R2-PINH1.2 93.28,62.39 90.51,62.39 90.27,62.64 | 43.14,62.39 37.95,62.39 37.74,62.19 37.74,61.35 35.94,59.55 35.94,59.35 U1.3 | 43.14,62.39 43.63,61.91 U1.8 43.7,61.77 43.7,60.66 U1.7 | 90.27,62.64 89.82,63.09 R1-PINH1.2 89.68,63.23 88.02,64.89 D7.2 87.95,65.03 87.95,89.68 83.1,94.53 3V3.TP 82.96,94.67 81.16,94.67 67.8,108.03 R_BOOT.2 67.66,108.1 67.24,108.1 66.34,107.2 52.56,107.2 | 90.27,62.64 88.99,61.35 88.99,60.94 U3.2 | 52.56,107.2 52.56,108.38 53.25,109.07 R_RESET.2 | 52.56,107.2 52.56,106.02 47.99,101.45 47.78,101.45 IC1.2 47.64,101.31 47.44,101.31 43.21,97.09 | 43.21,97.09 43.21,62.53 43.14,62.39
32KHZ  (via drill 0.3)
  Top 0.15: 90.92,61.01 90.37,61.01 90.3,60.94 U3.1 | 90.92,61.01 93.28,61.01 R2-PINH1.1 | v18.28,50.76 17.94,50.41 17.94,49.51 U2.9 | v90.92,61.08 90.92,61.01
  Bottom 0.15: v18.28,50.76 18.28,57.13 23.89,62.74 89.26,62.74 v90.92,61.08
DN  (via drill 0.3)
  Top 0.15: v163.29,53.6 164.19,53.6 J2.B7 | v163.29,54.57 164.19,54.57 J2.A7 | v155.88,48.48 155.6,48.75 155.6,49.1 D1.4
  Bottom 0.15: v163.29,54.57 v163.29,53.6 163.22,53.6 158.1,48.48 v155.88,48.48
DP
  Top 0.15: 162.81,54.43 163.15,54.08 164.19,54.08 J2.A6 | 162.81,54.43 162.81,54.71 163.15,55.05 164.19,55.05 J2.B6 | D1.6 155.6,51.04 159.34,51.04 162.74,54.43 162.81,54.43
EPD_3V3
  Top 0.3: 78.91,27.18 79.08,27.01 79.08,26.66 C7.1 | 78.91,27.18 78.05,28.05 76.94,28.05 75.41,26.52 75.41,26.38 Q2.2 | 78.91,27.18 80.26,28.53 L1.2 80.4,28.46 82.96,28.46 87.12,24.31 87.12,23.96 87.81,23.27 EPD_C5.1 87.88,23.13 87.88,22.51 | J1.16 83.58,16.07 84,16.07 J1.15 84.07,16.2 84.07,16.55 87.88,20.36 87.88,22.51 | 87.88,22.51 92.38,22.51 93.21,23.34 EPD_3V3.TP
EPD_3V3_C
  Top 0.3: 74.69,27.6 75.34,28.25 Q2.1 | 74.69,27.6 73.75,26.66 73.2,26.66 R_CL1.2 | EPD_3V3_C.TP 20.57,72.92 20.5,72.85 20.5,66.97 U2.18 20.57,66.83 20.57,66.48 29.57,57.48 44.8,57.48 74.69,27.6
EPD_BUSY  (via drill 0.3)
  Top 0.15: v87.05,15.23 87.05,16 J1.9 87.12,16.07 87.12,16.48 88.16,17.52 v88.16,17.66 | v99.51,15.23 106.99,7.76 EPD_BUSY.TP | v45.98,55.54 21.47,55.54 10.32,66.69 10.32,66.89 U2.26
  Bottom 0.15: v99.51,15.23 v87.05,15.23 | v45.98,55.54 66.89,55.54 89.26,33.17 89.26,24.03 88.16,22.92 v88.16,17.66
EPD_CS  (via drill 0.3)
  Top 0.15: v85.59,17.17 85.59,16.07 J1.12 | v77.97,20.64 74.44,24.17 D6.2 | 71.19,25.14 71.19,23.75 v72.37,22.58 | 71.19,25.14 71.19,26.66 R9.1 | v20.5,45.29 20.5,49.44 U2.11 | 71.19,25.14 v50.69,25.14 | v102,16.69 EPD_CS.TP
  Bottom 0.15: v72.37,22.58 75.97,22.58 77.91,20.64 v77.97,20.64 81.92,20.64 85.39,17.17 v85.59,17.17 85.66,17.17 86.15,16.69 v102,16.69 | v20.5,45.29 20.5,39.13 34.49,25.14 v50.69,25.14
EPD_DC  (via drill 0.3)
  Top 0.15: v86.42,15.23 86.08,15.58 86.08,16 J1.11 | v105.61,15.72 106.85,15.72 106.99,15.58 EPD_DC.TP | v12.88,46.33 12.88,49.44 U2.5
  Bottom 0.15: v105.61,15.72 86.91,15.72 v86.42,15.23 86.36,15.23 85.87,14.75 44.46,14.75 v12.88,46.33
EPD_RST  (via drill 0.3)
  Top 0.15: v87.19,17.17 86.56,16.55 86.56,16.07 J1.10 | v104.78,17.17 106.99,19.39 EPD_RST.TP | v45.5,56.02 27.29,56.02 16.69,66.62 16.69,66.89 U2.21
  Bottom 0.15: v104.78,17.17 89.12,17.17 | 89.12,17.17 v87.19,17.17 | v45.5,56.02 66.83,56.02 89.54,33.31 89.54,22.3 89.12,21.88 89.12,17.17
FLASH_CS  (via drill 0.3)
  Top 0.15: 35.87,52.28 36.29,52.28 36.36,52.35 D9.2 | 35.87,52.28 34.07,52.28 R5.1 34,52.22 33.66,51.87 23.89,51.87 21.74,49.72 21.74,49.51 U2.12 | v35.87,61.22 35.87,61.84 U1.1 | 35.87,52.28 v35.87,53.32
  Bottom 0.15: v35.87,53.32 v35.87,61.22
GDR
  Top 0.15: J1.2 90.58,16 90.58,15.65 92.03,14.2 92.31,14.2 92.52,13.99 92.52,13.09 90.23,10.8 63.99,10.8 63.5,11.29 63.5,13.02 64.68,14.2 64.96,14.2 R4.1 65.03,14.27 65.93,15.17 65.93,16.34 Q3.1
GND  (via drill 0.3)
  Top 0.15: 30.4,32.2 31.72,32.2 GND.TP 31.79,32.27 v34.14,32.27 | 30.4,32.2 24.72,32.2 7.76,49.17 7.76,49.44 U2.1 | 37.12,58.1 37.95,58.1 39.75,59.9 U1.9 | 37.12,58.1 35.94,58.1 U1.4 | D11.1 47.78,32.13 44.25,32.13 D12.1 44.18,32.13 40.65,32.13 D10.1 40.65,32.2 37.36,35.49 | 37.36,35.49 36.42,36.42 36.42,50.83 D9.1 36.42,50.9 37.12,51.59 v37.12,53.32 36.49,53.32 34.56,55.26 15.03,55.26 14.82,55.47 U2.29_7 | v37.12,58.03 37.12,58.1 | U2.29_7 14.75,55.47 14.75,56.65 U2.29_8 14.75,56.72 14.75,57.89 U2.29_9 14.68,57.96 13.5,57.96 U2.29_6 13.43,57.96 12.26,57.96 U2.29_3 12.26,58.03 12.26,61.35 7.76,65.86 7.76,66.89 U2.28 7.76,66.97 7.76,72.09 15.37,79.71 15.37,85.39 J4.G1 15.37,85.45 15.37,86.49 14.61,87.25 14.61,90.3 15.37,91.06 J4.G2 15.37,91.13 12.12,94.39 12.12,99.31 D8.1 12.05,99.37 v9.76,101.66 | U2.29_5 13.43,56.65 12.33,56.65 U2.29_2 12.26,56.65 12.26,55.47 U2.29_1 12.33,55.47 13.43,55.47 U2.29_4 13.5,55.47 14.68,55.47 U2.29_7 | v37.33,35.46 37.36,35.49 | 50.69,102.91 52.01,102.91 52.35,102.56 C_DELAY.2 | 50.69,102.91 50,102.91 49.86,102.77 49.86,102.49 48.27,100.9 48.2,100.9 47.78,100.48 IC1.3 | RESET_BUTTON.2 50.69,108.24 47.3,108.24 RESET_BUTTON.1 47.23,108.24 46.26,109.21 45.64,109.21 C5.2 45.57,109.28 31.51,109.28 30.95,109.83 27.08,109.83 26.66,109.42 26.66,109.14 25.76,108.24 CHANGE_BUTTON.2 25.69,108.24 22.3,108.24 CHANGE_BUTTON.1 22.23,108.24 21.26,109.21 20.43,109.21 C10.2 20.36,109.21 13.09,109.21 7.65,103.77 | v50.69,103.39 50.69,102.91 | v50.69,106.16 50.69,108.17 RESET_BUTTON.2 | GND_.TP 82.96,100.48 76.52,100.48 68.28,108.72 66.2,108.72 65.79,108.31 BOOT_BUTTON.2 65.72,108.24 62.26,108.24 BOOT_BUTTON.1 62.19,108.24 62.05,108.1 60.39,108.1 C6.2 60.32,107.96 59.35,107.96 57.62,109.69 52.7,109.69 52.63,109.62 52.63,109 51.94,108.31 50.76,108.31 RESET_BUTTON.2
  Top 0.15: J4.G3 1.18,89.54 4.29,92.66 J4.P6 4.78,92.73 4.29,92.73 2.22,94.8 2.22,95.5 J4.G4 2.22,95.56 2.22,98.2 5.96,101.94 5.96,102.08 C9.2 6.03,102.14 7.65,103.77 | v7.69,103.74 7.65,103.77 | C2.2 158.03,5.89 156.09,5.89 C1.2 156.09,5.96 154.84,7.2 154.84,10.39 154.57,10.66 SENSOR2.7 154.57,10.73 154.57,11.01 154.98,11.43 | 154.98,11.43 155.6,11.43 156.09,10.94 156.09,10.73 SENSOR2.5 156.16,10.94 163.01,17.8 165.3,17.8 J3.1 165.37,17.87 165.72,17.87 166.27,18.42 166.27,31.86 156.5,41.62 156.5,41.69 | SENSOR2.1 153.74,13.57 153.74,12.74 154.98,11.49 154.98,11.43 | C4_USB.2 154.36,47.44 154.36,46.4 C5_USB.2 154.36,46.26 154.36,42.1 154.77,41.69 156.5,41.69 | J2.B12 164.26,50.97 J2.A1 164.26,50.9 164.26,49.79 164.81,49.24 J2.MP3 | 156.5,41.69 164.4,49.58 J2.MP3 | J2.MP3 164.88,49.24 168.69,49.24 J2.MP1 168.69,49.31 168.69,59.35 J2.MP2 168.69,59.42 164.88,59.42 J2.MP4 164.81,59.35 164.26,58.79 164.26,57.69 J2.A12 164.26,57.62 164.26,57.41 J2.B1 164.19,57.34 161.28,57.34 156.92,52.98 R2-USB.2 156.85,52.91 156.16,52.91 153.39,50.14 153.11,50.14 D1.2 153.04,50.07 152.84,49.86 150,49.86 R2-USB1.1 150,49.93 136.08,63.85 136.08,64.4 135.38,65.09 134.34,65.09 131.16,61.91 131.16,53.74 131.09,53.74 | J1.8 87.53,16 87.53,15.1 87.19,14.75 84,14.75 83.1,15.65 83.1,16 J1.17 83.1,16.07 83.1,19.39 86.42,22.71 86.42,23.75 | 80.47,24.45 79.78,24.45 EPD_C9.2 79.64,24.45 77.97,24.45 EPD_C10.2 77.84,24.45 77.42,24.86 73.82,24.86 73.13,24.17 72.99,24.17 D6.1 72.85,24.17 72.85,21.95 71.74,20.84 EPD_C11.2 71.74,20.77 70.22,20.77 EPD_C12.2 70.15,20.71 70.15,20.57 66.52,16.93
  Top 0.15: 80.47,24.45 81.65,24.45 EPD_C8.2 81.72,24.52 83.72,24.52 EPD_C7.2 83.79,24.45 85.73,24.45 EPD_C6.2 85.8,24.38 86.42,23.75 | 80.47,24.45 80.47,26.59 C7.2 | J1.MP1 92.03,13.57 78.6,13.57 J1.MP2 78.53,13.5 68.97,13.5 68,12.53 R2.1 67.93,12.46 66.55,11.08 65.23,11.08 64.4,11.91 64.4,12.12 SJ1.1 64.4,12.19 64.4,12.4 66.2,14.2 R4.2 66.27,14.27 66.41,14.4 66.41,16.83 66.52,16.93 | U4.9 131.71,52.98 131.02,52.28 130.74,52.28 U4.4 130.68,52.22 130.68,52.08 127.77,49.17 125.83,49.17 123.54,51.45 123.33,51.45 MCP73831.2 123.2,51.52 122.92,51.52 122.05,52.39 | 131.09,53.74 130.74,53.74 U4.1 | 131.09,53.74 131.64,53.18 131.64,53.05 U4.9 | U4.6 132.61,52.84 131.92,52.84 131.78,52.98 U4.9 | 117.03,53.39 121.05,53.39 122.05,52.39 | 117.03,53.39 114.12,53.39 113.08,52.35 112.95,52.35 C1_BAT.2 | v117.03,51.45 117.03,50.48 R2_BAT.2 | v117.03,53.53 117.03,53.39 | 122.05,52.39 123.33,53.67 125.83,53.67 C2_BAT.2 | C1_BAT2.2 126.52,41.27 125.14,41.27 123.61,39.75 C3.- 123.47,39.68 118.56,39.68 118.07,40.16 118,40.16 | 117.9,42 118,41.9 118,40.16 | 117.9,42 117.52,42.38 117.38,42.38 IC4.2 | 118,40.16 116.96,39.13 115.99,39.13 115.3,39.82 C1_BAT1.2 115.23,39.89 115.02,39.89 112.95,41.97 R1_PWRUSB.1 112.88,42.03 106.78,42.03 95.84,52.98 C10_SUPERCAP.1 95.77,53.05 89.96,53.05 89.68,53.32 87.81,53.32 86.49,52.01 86.49,51.66 U3.13 86.49,51.59 86.49,51.24 88.16,49.58 88.16,48.48 C8.2 88.16,48.34 88.16,30.33 90.03,28.46 90.03,28.32 D3.1 90.09,28.25 90.09,24.52 EPD_C2.2 | 88.78,24.45 89.75,24.45 EPD_C2.2 | 88.78,24.45 87.95,24.45 EPD_C5.2 | EPD_C1.2 91.69,24.45 89.82,24.45 EPD_C2.2
  Top 0.15: 117.9,42 v118.21,42.31 | v86.56,23.75 86.42,23.75 | v88.78,24.38 88.78,24.45 | 30.4,32.2 30.4,23.41 36.63,17.17 66.27,17.17 66.52,16.93
  Bottom 0.15: v37.12,53.32 v37.12,58.03 | v37.33,35.46 v34.14,32.27 | v50.69,106.16 v50.69,103.39 | v7.69,103.74 v9.76,101.66 | v117.03,53.53 v117.03,51.45 117.03,43.49 v118.21,42.31 | v86.56,23.75 88.16,23.75 v88.78,24.38
  pour Top: 73.38,0.17 170.03,0.17 170.03,67.03 73.38,67.03
  pour Top: 6.38,0.17 75.83,0.17 75.83,110.42 6.38,110.42
  pour Top: 68.67,10.07 92.03,10.07 92.03,111.03 68.67,111.03
  pour Top: 91.97,10.07 94.22,10.07 94.22,67.03 91.97,67.03
  pour Top: 0.17,67.47 40.02,67.47 40.02,111.03 0.17,111.03
  pour Top: 0.17,0.17 6.22,0.17 6.22,48.92 0.17,48.92
  pour Bottom: 6.38,0.18 75.82,0.18 75.82,110.42 6.38,110.42
  pour Bottom: 68.68,10.08 92.02,10.08 92.02,111.02 68.68,111.02
  pour Bottom: 0.18,67.48 19.62,67.48 19.62,111.02 0.18,111.02
  pour Bottom: 94.38,0.18 170.02,0.18 170.02,67.02 94.38,67.02
  pour Bottom: 6.48,10.08 169.22,10.08 169.22,67.02 6.48,67.02
  pour Bottom: 0.18,0.18 75.82,0.18 75.82,48.92 0.18,48.92
  pour Top: 45.89,56 44.67,57.22 31.88,57.22 31.86,57.24 23.07,66.02 11.28,66.02 21.53,55.78 45.67,55.78
  pour Top: 156.46,45.64 156.48,45.62 156.48,45.08 163.52,52.13 163.52,55.92 159.34,51.74 159.32,51.72 156.48,51.72 156.48,49.93 156.76,49.64 156.78,49.62 156.78,48.18 156.76,48.16 156.18,47.57 156.18,45.73 156.23,45.68 156.42,45.68 156.44,45.66
  pour Top: 117.98,51.42 117.98,51.08 118.82,51.08 118.84,51.06 118.86,51.04 118.88,51.02 118.88,50.68 119.92,50.68 119.92,50.82 119.94,50.84 119.96,50.86 119.98,50.88 120.92,50.88 120.92,51.07 120.34,51.66 120.32,51.68 120.32,52.02 118.98,52.02 118.98,51.68 118.96,51.66 118.94,51.64 118.92,51.62 117.78,51.62 117.96,51.44
  pour Top: 94.36,61.64 94.38,61.62 94.38,61.03 101.9,53.51 101.92,53.53 101.92,54.57 93.98,62.52 93.98,62.03
  pour Top: 89.26,52.66 89.24,52.64 89.22,52.62 88.78,52.62 88.78,50.43 89.42,49.78 89.42,49.82 89.44,49.84 89.46,49.86 89.48,49.88 89.52,49.88 89.54,49.86 89.56,49.84 89.58,49.82 89.58,49.78 89.67,49.78 90.52,50.63 90.52,52.57 90.47,52.62 89.78,52.62 89.76,52.64 89.74,52.66 89.72,52.68 89.72,52.92 89.68,52.92 89.66,52.94 89.57,53.02 89.48,53.02 89.48,52.98 89.46,52.96 89.28,52.77 89.28,52.68
  pour Top: 85.58,59.88 86.02,59.88 86.02,61.47 85.67,61.82 85.58,61.82
  pour Top: 13.53,45.08 26.97,45.08 34.92,53.02 5.58,53.02
GPIO8
  Top 0.15: R1.2 19.18,46.05 19.18,49.44 U2.10
I2C_PW  (via drill 0.3)
  Top 0.15: SENSOR2.6 155.33,10.66 155.33,7.89 156.02,7.2 C1.1 156.09,7.13 C2.1 158.1,7.06 158.1,6.86 158.72,6.23 158.72,5.4 158.58,5.26 155.05,5.26 154.91,5.4 154.84,5.4 | R1-PINH.2 152.14,7.13 154.08,7.13 R2-PINH.2 | SENSOR2.8 153.74,10.66 153.74,7.2 R2-PINH.2 | 151.17,6.44 151.17,5.26 151.45,4.99 154.43,4.99 154.84,5.4 | 151.17,6.44 151.17,12.53 153.46,14.82 156.78,14.82 157.13,14.47 157.13,13.57 155.81,12.26 154.91,12.26 154.57,12.6 154.57,13.57 SENSOR2.2 | 154.84,5.4 154.84,6.37 154.15,7.06 R2-PINH.2 | v30.54,58.45 29.98,58.45 21.74,66.69 21.74,66.89 U2.17 | v29.92,30.33 29.92,23.48 43.21,10.18 102.77,10.18 106.51,6.44 151.17,6.44
  Bottom 0.15: v30.54,58.45 30.75,58.45 30.82,58.52 31.72,58.52 32.06,58.17 32.06,32.48 v29.92,30.33
INT_RTC  (via drill 0.3)
  Top 0.15: v18.77,51.87 16.69,49.79 16.69,49.51 U2.8 | v81.99,59.69 86.77,59.69 87.67,60.59 87.67,60.87 U3.3 87.74,60.94 88.36,61.56 88.36,63.16 R1-PINH1.1 88.36,63.23 83.03,68.56 83.03,88.57 INT_RTC.TP
  Bottom 0.15: v18.77,51.87 22.71,51.87 32.83,61.98 79.71,61.98 v81.99,59.69
IO/BOOT  (via drill 0.3)
  Top 0.15: R_BOOT.1 67.66,109.48 66,109.48 65.79,109.69 BOOT_BUTTON.3 65.72,109.76 BOOT_BUTTON.4 62.19,109.69 61.84,109.35 60.39,109.35 C6.1 60.32,109.28 v59.49,108.44 | v24.31,70.57 24.31,66.97 U2.15
  Bottom 0.15: v24.31,70.57 24.31,73.27 v59.49,108.44
IO/CHANGE  (via drill 0.3)
  Top 0.15: v21.12,108.65 20.43,107.96 C10.1 | v21.19,109.76 22.23,109.76 CHANGE_BUTTON.4 22.3,109.76 25.69,109.76 CHANGE_BUTTON.3 | v27.08,107.2 27.56,107.68 27.56,107.89 R_CHANGE.1 | v14.13,71.47 14.13,66.97 U2.23
  Bottom 0.15: v21.19,109.76 21.12,109.69 v21.12,108.65 21.19,108.65 22.64,107.2 | 22.64,107.2 v27.08,107.2 | v14.13,71.47 14.13,98.61 22.64,107.13 22.64,107.2
MISO  (via drill 0.3)
  Top 0.15: D12.2 44.18,30.54 44.11,30.47 44.11,28.05 R8.1 44.04,27.98 v41.27,27.98 | v33.03,27.98 31.72,27.98 MISO.TP | 34.83,60.66 35.87,60.66 U1.2 | 34.83,60.66 21.33,74.17 10.53,74.17 | 10.53,74.17 9.07,72.71 9.07,66.97 U2.27 | v3.88,93.76 4.99,93.76 J4.P7 | v10.53,74.24 10.53,74.17 | v33.66,59.42 34.83,60.59 34.83,60.66
  Bottom 0.15: 33.66,27.98 v33.03,27.98 | 33.66,27.98 v41.27,27.98 | v3.88,93.76 3.88,92.17 10.53,85.52 v10.53,74.24 | v33.66,59.42 33.66,27.98
MOSI  (via drill 0.3)
  Top 0.15: v85.11,16.83 84.97,16.83 84.55,16.41 84.55,16.07 J1.14 | v49.65,27.42 49.1,27.98 47.78,27.98 R7.1 47.85,28.05 47.85,30.54 D11.2 | v44.53,58.03 43.7,58.03 U1.5 | v23.82,52.35 18,52.35 15.37,49.72 15.37,49.51 U2.7 | v4.29,88.64 4.99,89.33 J4.P3 | v50.97,26.11 48.61,23.75 37.81,23.75 MOSI.TP
  Bottom 0.15: v85.11,16.83 60.25,16.83 v50.97,26.11 v49.65,27.42 49.65,27.49 44.53,32.62 v44.53,58.03 44.53,58.45 41.27,61.7 33.17,61.7 v23.82,52.35 23.75,52.35 21.68,50.28 17.94,50.28 6.79,61.42 6.79,67.1 4.29,69.6 v4.29,88.64
N$1
  Top 0.15: R2-USB.1 156.92,51.66 159.34,51.66 163.71,56.02 164.19,56.02 J2.B5
N$2  (via drill 0.3)
  Top 0.15: v152.07,51.18 150,51.18 R2-USB1.2 | v160.18,51.18 161.84,51.18 163.71,53.05 164.19,53.05 J2.A5
  Bottom 0.15: v152.07,51.18 v160.18,51.18
N$3
  Top 0.15: IC1.5 50.55,102.35 51.24,102.35 52.35,101.24 C_DELAY.1
N$4  (via drill 0.3)
  Top 0.15: v121.95,48.41 120.63,48.41 R1_BAT.1 | v123.4,49.86 123.4,50.34 123.27,50.48 MCP73831.1
  Bottom 0.15: v123.4,49.86 v121.95,48.41
N$5  (via drill 0.3)
  Top 0.15: 116.69,41.48 117.31,41.48 IC4.3 | 116.69,41.48 116.62,41.48 | 116.62,41.48 114.82,41.48 D2.1 | 116.62,41.48 116.62,39.89 C1_BAT1.1 | 116.69,41.48 116.69,42.8 116.83,42.94 116.89,42.94 117.31,43.35 IC4.1 117.38,43.35 117.79,42.94 v118.21,42.94 | v127.14,47.71 128.18,47.71 Q1.2
  Bottom 0.15: v127.14,47.71 122.99,47.71 v118.21,42.94
N$6
  Top 0.15: CHG_LED.C 116.89,52.22 117.79,51.31 117.79,49.86 120.56,47.09 R1_BAT.2
N$7
  Top 0.15: C4.1 95.7,31.86 93.63,31.86 D4.1 93.56,31.79 93.56,28.32 D3.2
N$8
  Top 0.15: R2_BAT.1 118.42,50.48 120.63,50.48 MCP73831.5
N$16  (via drill 0.3)
  Top 0.15: v88.64,21.95 88.99,21.61 88.99,16.07 J1.5 | v88.92,23.06 89.68,23.06 EPD_C2.1
  Bottom 0.15: v88.64,21.95 88.64,22.78 v88.92,23.06
N$17  (via drill 0.3)
  Top 0.15: v89.61,21.74 89.61,16.07 J1.4 | v90.92,23.06 91.62,23.06 91.69,23.13 EPD_C1.1
  Bottom 0.15: v90.92,23.06 v89.61,21.74
N$18  (via drill 0.3)
  Top 0.15: v102.21,53.53 102.21,54.57 91.89,64.89 D7.1 | v93.9,52.56 93.28,52.56 93.07,52.35 R_CAPACITATOR.2
  Bottom 0.15: v102.21,53.53 94.87,53.53 v93.9,52.56
N$19
  Top 0.15: J1.24 79.5,16.07 73.54,16.07 70.22,19.39 EPD_C12.1
N$21
  Top 0.15: J1.22 80.54,16.07 80.54,20.57 77.97,23.13 EPD_C10.1
N$23
  Top 0.15: J1.19 82.06,16.07 82.06,21.47 83.72,23.13 EPD_C7.1
N$24
  Top 0.15: J1.20 81.58,16.07 81.58,23.06 81.65,23.13 EPD_C8.1
N$25
  Top 0.15: J1.18 82.61,16.07 82.61,20.01 85.73,23.13 EPD_C6.1
PREVGH  (via drill 0.3)
  Top 0.15: J1.21 81.02,16.07 81.02,21.81 EPD_C9.1 79.78,23.13 v80.4,23.75 | D5.1 82.06,35.46 82.06,35.02 83.73,33.35 83.73,32.99 83.58,32.85 v83.58,28.6
  Bottom 0.15: v83.58,28.6 83.58,26.94 v80.4,23.75
PREVGL  (via drill 0.3)
  Top 0.15: 77.32,19.15 77.08,19.39 71.81,19.39 EPD_C11.1 | 77.32,19.15 79.98,16.48 79.98,16.07 J1.23 | v88.71,30.4 90.09,31.79 D4.2 | 77.32,19.15 v79.29,21.12
  Bottom 0.15: v88.71,30.4 88.57,30.4 v79.29,21.12
RESE
  Top 0.15: J1.3 90.03,16 90.03,15.65 88.85,14.47 73.96,14.47 71.53,16.9 70.43,16.9 69.8,16.27 R3.1 69.8,16.34 67.31,16.34 Q3.2
RESE'
  Top 0.15: SJ1.2 65.93,12.19 67.52,13.78 67.93,13.78 R2.2 68,13.85 68.49,13.85 70.84,16.2 70.98,16.2 R3.2
RESET  (via drill 0.3)
  Top 0.15: 47.71,103.94 47.71,105.81 45.64,107.89 C5.1 | 47.71,103.94 47.71,102.42 IC1.1 | v54.02,108.44 53.46,107.89 53.32,107.89 R_RESET.1 | v51.87,108.86 51.66,108.86 RESET_BUTTON.3 50.69,109.76 47.3,109.76 RESET_BUTTON.4 | v10.32,62.67 10.32,49.51 U2.3 | v47.78,103.94 47.71,103.94
  Bottom 0.15: 52.28,108.44 v54.02,108.44 | v51.87,108.86 52.28,108.44 | v10.32,62.67 10.32,66.41 47.82,103.91 | 47.82,103.91 52.28,108.38 52.28,108.44 | v47.78,103.94 47.82,103.91
RTC_RST  (via drill 0.3)
  Top 0.15: v25.62,64.06 22.99,66.69 22.99,66.89 U2.16 | v83.65,64.06 86.42,61.29 U3.4
  Bottom 0.15: v83.65,64.06 v25.62,64.06
RX
  Top 0.15: U2.24 12.88,66.97 12.88,71.81 13.85,72.78 RX.TP
SCK  (via drill 0.3)
  Top 0.15: v84.62,15.23 85.04,15.65 85.04,16 J1.13 | v49.03,27.42 41.06,27.42 40.51,27.98 R6.1 40.58,27.98 40.58,30.54 D10.2 | v43.7,58.66 43.7,59.28 U1.6 | 17.24,52.84 14.13,49.72 14.13,49.51 U2.6 | v35.39,52.84 17.24,52.84 | v3.88,91.55 4.99,91.55 J4.P5 | v17.24,52.91 17.24,52.84 | v37.12,29.29 31.72,23.89 SCK.TP
  Bottom 0.15: v84.62,15.23 61.22,15.23 v49.03,27.42 49.03,27.49 43.7,32.83 | 43.7,32.83 43.7,52.84 | 43.7,52.84 v43.7,58.66 | 43.7,52.84 v35.39,52.84 | v3.88,91.55 7.2,88.22 7.27,88.22 9.83,85.66 9.83,60.32 v17.24,52.91 | v37.12,29.29 40.1,29.29 43.63,32.83 43.7,32.83
SCL  (via drill 0.3)
  Top 0.15: R2-PINH.1 154.08,5.82 153.25,5.82 152.7,5.26 151.59,5.26 151.45,5.4 151.45,12.4 153.39,14.34 155.6,14.34 156.09,13.85 156.09,13.64 SENSOR2.4 156.16,13.85 v156.64,14.34 | v163.08,20.77 165.3,20.77 J3.4 | v133.44,53.05 133.24,53.25 132.68,53.25 U4.7 | v90.92,52.28 90.3,51.66 U3.16 | v45.01,56.51 28.12,56.51 17.94,66.69 17.94,66.89 U2.20
  Bottom 0.15: v156.64,14.34 v163.08,20.77 163.08,23.34 133.44,52.98 v133.44,53.05 118.14,53.05 117.17,54.02 92.66,54.02 v90.92,52.28 89.47,52.28 85.25,56.51 v45.01,56.51
SDA  (via drill 0.3)
  Top 0.15: v152.97,6.65 152.9,6.65 152.14,5.89 R1-PINH.1 | v155.05,12.74 155.05,13.37 155.26,13.57 SENSOR2.3 | v162.67,19.74 165.3,19.74 J3.3 | v133.72,53.6 133.58,53.74 132.68,53.74 U4.8 | v89.54,52.84 89.54,52.22 88.99,51.66 U3.15 | v24.03,62.26 23.61,62.26 19.18,66.69 19.18,66.89 U2.19
  Bottom 0.15: v152.97,6.65 152.97,10.66 v155.05,12.74 155.67,12.74 v162.67,19.74 162.74,19.74 163.57,20.57 163.57,23.68 133.72,53.53 v133.72,53.6 118,53.6 117.31,54.29 91,54.29 v89.54,52.84 89.47,52.84 80.05,62.26 v24.03,62.26
SRC  (via drill 0.3)
  Top 0.15: v88.64,33.17 C4.2 | v83.3,33.17 80.33,33.17 L1.1 80.33,33.24 78.53,35.04 78.53,35.46 D5.2 | v67.52,18.56 66.62,18.56 Q3.3
  Bottom 0.15: v88.64,33.17 v83.3,33.17 82.34,33.17 67.73,18.56 v67.52,18.56
SS_SD  (via drill 0.3)
  Top 0.15: R10.1 8.38,100.83 9.07,100.83 10.53,99.37 D8.2 10.53,99.31 10.53,91.13 v7.13,87.74 | v11.49,57.34 11.49,49.51 U2.4 | v6.03,86.56 6.03,87.74 5.47,88.29 J4.P2
  Bottom 0.15: v11.49,57.34 11.49,58.24 7.06,62.67 7.06,85.52 v6.03,86.56 6.03,86.63 v7.13,87.74
TX
  Top 0.15: U2.25 11.49,66.97 11.49,72.44 11.08,72.85 TX.TP
USB_D+  (via drill 0.3)
  Top 0.15: v150,54.08 153.04,51.04 D1.1 | v31.65,63.23 31.65,58.1 v31.58,58.03 | v24.31,50.76 24.31,49.51 U2.14
  Bottom 0.15: v150,54.08 117.93,54.08 108.79,63.23 v31.65,63.23 | v24.31,50.76 v31.58,58.03
USB_D-  (via drill 0.3)
  Top 0.15: v135.38,54.57 140.78,49.17 153.04,49.17 D1.3 | v31.02,63.23 31.02,58.1 v30.95,58.03 | v23.55,50.62 23.55,50.07 22.99,49.51 U2.13
  Bottom 0.15: v135.38,54.57 117.86,54.57 108.86,63.57 31.92,63.57 31.79,63.71 31.51,63.71 v31.02,63.23 | v23.55,50.62 v30.95,58.03
VBAT
  Top 0.3: U4.2 130.68,53.25 130.68,52.84 U4.3 130.54,52.77 129.98,52.77 | MCP73831.3 123.27,52.42 125.83,52.42 C2_BAT.1 125.9,52.28 127.21,50.97 | 127.21,50.97 127.21,49.93 Q1.3 | 129.98,52.77 129.08,52.77 127.35,51.04 127.21,50.97 | 129.98,52.77 129.98,53.95 130.74,54.71 130.74,63.85 VBAT.TP
VBUS
  Top 0.3: C5_USB.1 155.67,46.4 155.67,47.44 C4_USB.1 | D1.5 155.6,50.07 155.95,50.07 156.5,49.51 156.5,48.34 155.74,47.58 C4_USB.1 | C4_USB.1 155.54,47.58 154.84,48.27 153.94,48.27 151.1,45.43 151.1,43.77 PFMF.050.1.2 150.97,45.5 142.93,45.5 134.97,53.46 134.83,53.53 | R1_PWRUSB.2 112.95,43.35 114.54,43.35 114.75,43.56 D2.2 114.75,43.7 114.75,52.35 | 114.75,52.35 115.79,52.35 116.41,52.98 117.66,52.98 118.28,52.35 CHG_LED.A 118.42,52.28 120.56,52.28 120.63,52.35 MCP73831.4 120.63,52.15 120.63,51.87 124.72,47.78 126.31,47.78 Q1.1 126.45,47.85 127.14,48.54 129.84,48.54 134.83,53.53 | 114.75,52.35 114.26,52.35 C1_BAT.1 | 134.83,53.53 134.83,63.85 VBUS.TP
VRTC
  Top 0.3: C10_SUPERCAP.2 95.77,50.9 95.7,50.97 93.07,50.97 R_CAPACITATOR.1 92.93,50.9 91.2,50.9 89.82,49.51 89.54,49.51 89.4,49.44 | 89.4,49.44 89.4,48.48 C8.1 | 89.4,49.44 87.74,51.11 87.74,51.59 U3.14
VUSB
  Top 0.3: J2.A9 164.26,56.78 164.26,56.58 J2.B4 164.4,56.51 164.95,56.51 165.16,56.3 165.16,52.28 164.95,52.08 164.4,52.08 J2.B9 164.26,52.01 164.26,51.8 J2.A4 164.12,51.73 163.57,51.73 155.6,43.77 PFMF.050.1.1
(copper drawn outside any net)
  shapes: Top area x10